# EAGLE board comcon_version_av_antigua (EAGLE 6.5.0)
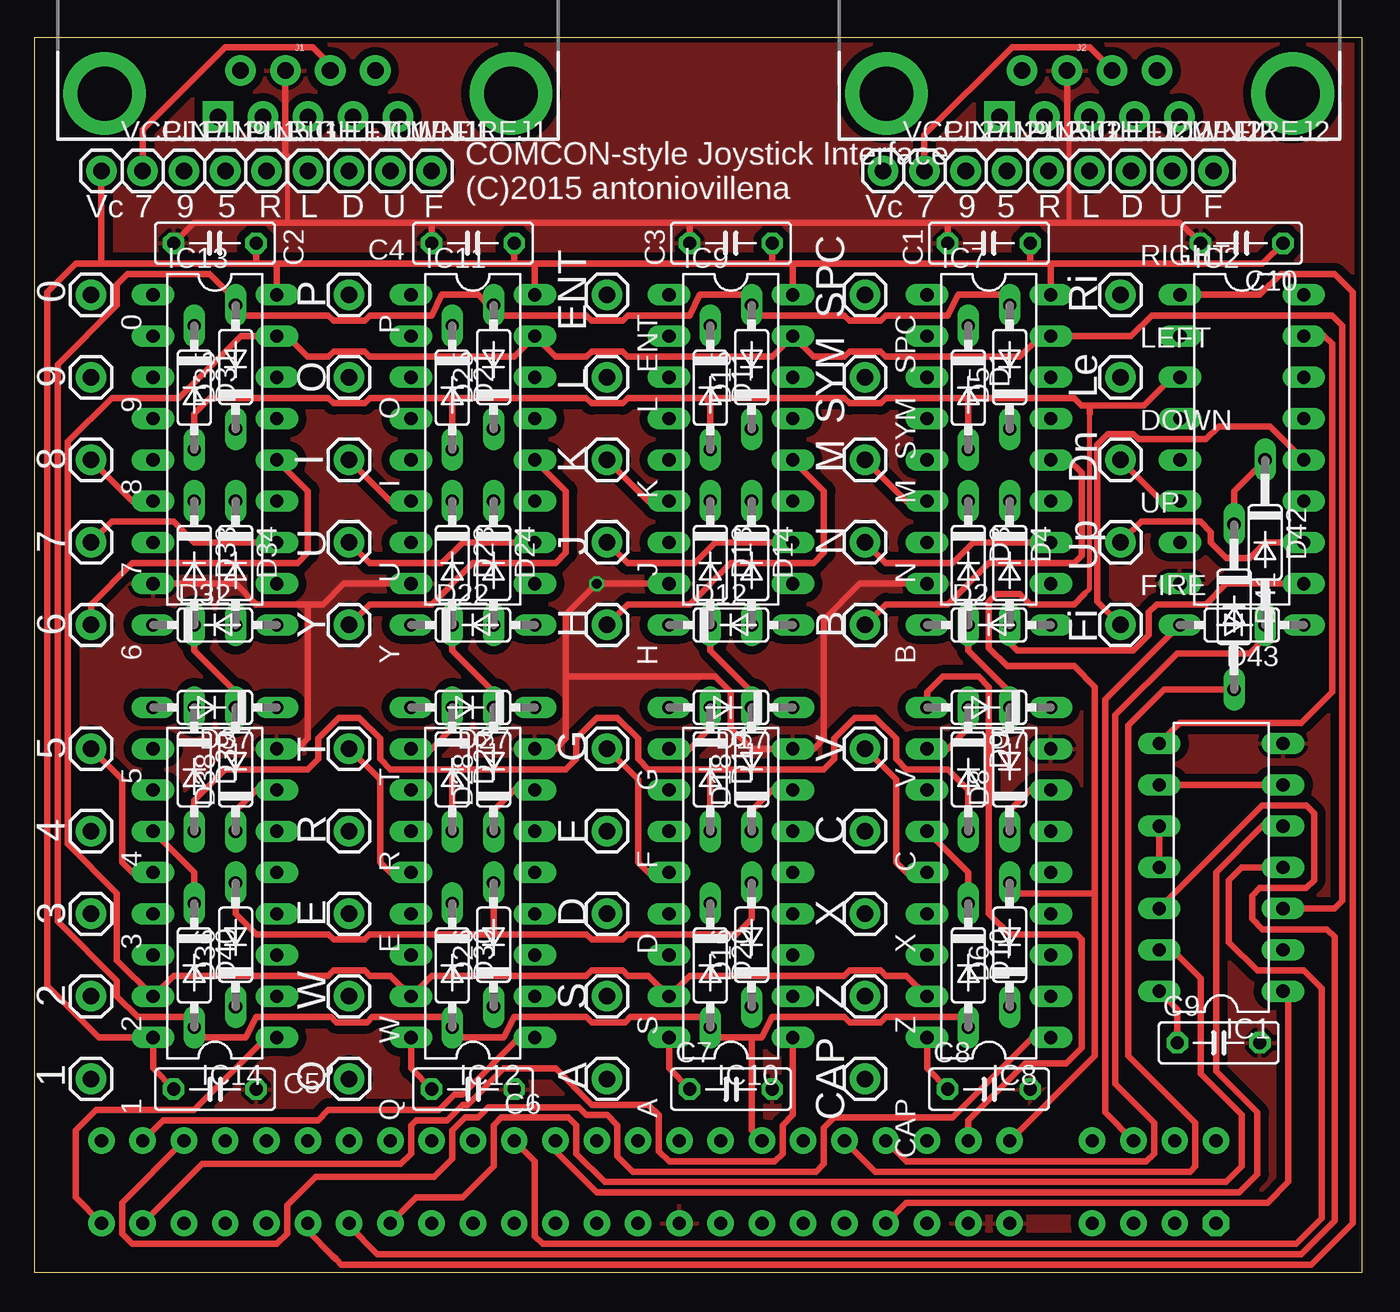
[diagram p0: board, top side]
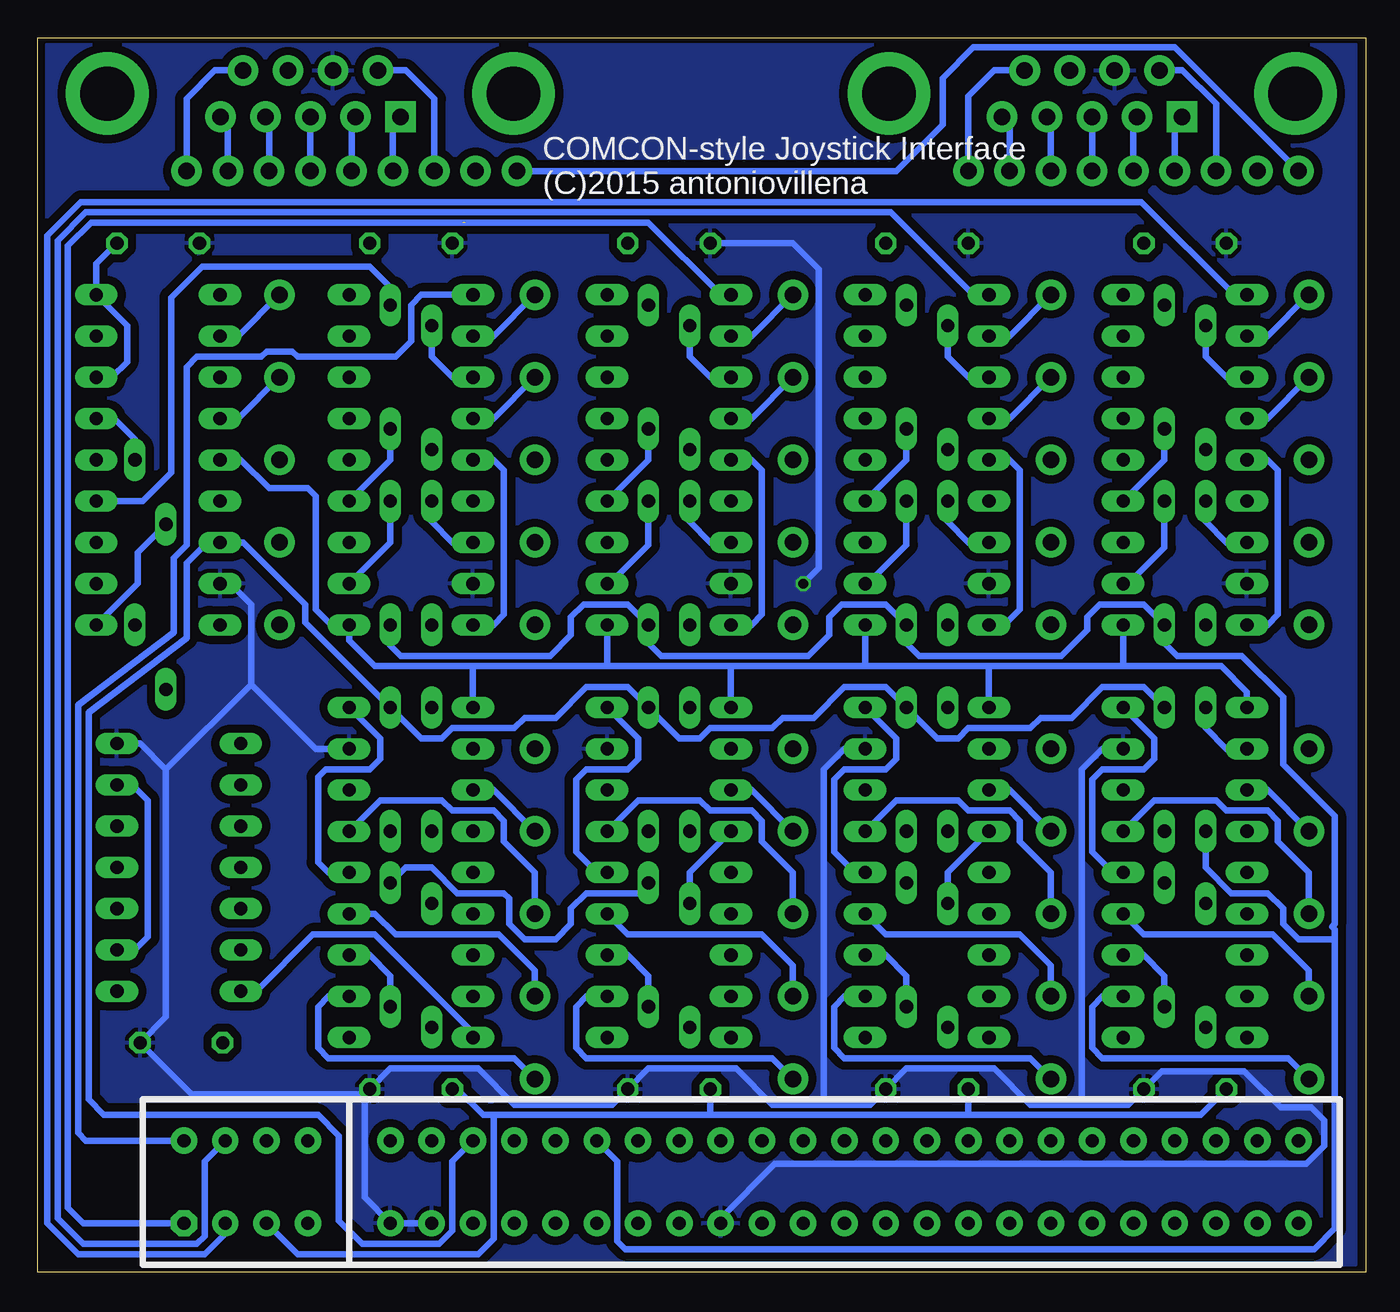
[diagram p1: board, bottom side, seen from below]

No outline drawn. Coordinates in mm, seen from the top.
Copper layers (1*16): Top 0.035mm / dielectric 1.5mm / Bottom 0.035mm
Design rules "seedstudio_Fusion_eagle_rule_v1.1 *": minimum track width 7mil, minimum drill 12mil, track to track 8mil, track to pad 10mil, pad to pad 6mil, via to via 10mil, smd to smd 0mil, copper to edge 10mil, drill to drill 10mil, minimum pad ring 10mil, minimum via ring 6mil, stop-mask expansion 2mil, vias tented up to drill 100mil, thermal gap 10mil
Net classes: 1 power: width 0.508 mm, clearance 0.254 mm to class 0, clearance 0.254 mm
Milling: 4 lines

## Footprints (pad centres in the part's own frame; a part is rotated, then mirrored left to right if it is on the bottom)
1X01 = drill 1.016 pad 1.88: 1 0,0
C050-025X075 = drill 0.813 octagon: 1 -2.54,0; 2 2.54,0
DO35-7 = drill 0.813 long: A 3.81,0; C -3.81,0
DO35-10 = drill 0.813 long: A 5.08,0; C -5.08,0
DIL14 = drill 0.813 long: 1 -7.62,-3.81; 2 -5.08,-3.81; 3 -2.54,-3.81; 4 0,-3.81; 5 2.54,-3.81; 6 5.08,-3.81; 7 7.62,-3.81; 8 7.62,3.81; 9 5.08,3.81; 10 2.54,3.81; 11 0,3.81; 12 -2.54,3.81; 13 -5.08,3.81; 14 -7.62,3.81
DIL16 = drill 0.813 long: 1 -8.89,-3.81; 2 -6.35,-3.81; 3 -3.81,-3.81; 4 -1.27,-3.81; 5 1.27,-3.81; 6 3.81,-3.81; 7 6.35,-3.81; 8 8.89,-3.81; 9 8.89,3.81; 10 6.35,3.81; 11 3.81,3.81; 12 1.27,3.81; 13 -1.27,3.81; 14 -3.81,3.81; 15 -6.35,3.81; 16 -8.89,3.81
DB9_MALE = drill 1.016 pad 1.88: 1 5.54,-1.42; 2 2.77,-1.42; 3 0,-1.42; 4 -2.77,-1.42; 6 4.15,1.42; 7 1.38,1.42; 8 -1.38,1.42; 9 -4.15,1.42 | drill 1.016 pad 1.88 square: 5 -5.54,-1.42 | drill 3.302 pad 5.08: G1 -12.5,0; G2 12.5,0
2X28_SPE = drill 0.813 pad 1.626 octagon: A1 0,-5.08 | drill 0.813 pad 1.626: A2 2.54,-5.08; A3 5.08,-5.08; A4 7.62,-5.08; A6 12.7,-5.08; A7 15.24,-5.08; A8 17.78,-5.08; A9 20.32,-5.08; A10 22.86,-5.08; A11 25.4,-5.08; A12 27.94,-5.08; A13 30.48,-5.08; A14 33.02,-5.08; A15 35.56,-5.08; A16 38.1,-5.08; A17 40.64,-5.08; A18 43.18,-5.08; A19 45.72,-5.08; A20 48.26,-5.08; A21 50.8,-5.08; A22 53.34,-5.08; A23 55.88,-5.08; A24 58.42,-5.08; A25 60.96,-5.08; A26 63.5,-5.08; A27 66.04,-5.08; A28 68.58,-5.08; B1 0,0; B2 2.54,0; B3 5.08,0; B4 7.62,0; B6 12.7,0; B7 15.24,0; B8 17.78,0; B9 20.32,0; B10 22.86,0; B11 25.4,0; B12 27.94,0; B13 30.48,0; B14 33.02,0; B15 35.56,0; B16 38.1,0; B17 40.64,0; B18 43.18,0; B19 45.72,0; B20 48.26,0; B21 50.8,0; B22 53.34,0; B23 55.88,0; B24 58.42,0; B25 60.96,0; B26 63.5,0; B27 66.04,0; B28 68.58,0

## Placement (x,y rotation side)
0  [1X01]  3.49,60.17 270 top
1  [1X01]  3.49,11.91 270 top
2  [1X01]  3.49,16.99 270 top
3  [1X01]  3.49,22.07 270 top
4  [1X01]  3.49,27.15 270 top
5  [1X01]  3.49,32.23 270 top
6  [1X01]  3.49,39.85 270 top
7  [1X01]  3.49,44.93 270 top
8  [1X01]  3.49,50.01 270 top
9  [1X01]  3.49,55.09 270 top
A  [1X01]  35.24,11.91 270 top
B  [1X01]  51.12,39.85 270 top
C  [1X01]  51.12,27.15 270 top
C1  100nF  [C050-025X075]  58.74,63.34 180 top
C2  100nF  [C050-025X075]  11.11,63.34 180 top
C3  100nF  [C050-025X075]  42.86,63.34 180 top
C4  100nF  [C050-025X075]  26.99,63.34 180 top
C5  100nF  [C050-025X075]  11.11,11.27 0 top
C6  100nF  [C050-025X075]  26.99,11.27 0 top
C7  100nF  [C050-025X075]  42.86,11.27 0 top
C8  100nF  [C050-025X075]  58.74,11.27 0 top
C9  100nF  [C050-025X075]  72.87,14.13 0 top
C10  100nF  [C050-025X075]  74.3,63.34 180 top
CAP  [1X01]  51.12,11.91 270 top
D  [1X01]  35.24,22.07 270 top
D1  [DO35-7]  57.47,54.45 270 top
D2  [DO35-7]  58.74,39.85 0 top
D3  [DO35-7]  57.47,43.66 270 top
D4  [DO35-7]  60.01,43.66 270 top
D5  [DO35-7]  60.01,55.72 90 top
D6  [DO35-7]  60.01,20.16 90 top
D7  [DO35-7]  58.74,34.77 180 top
D8  [DO35-7]  60.01,30.96 90 top
D9  [DO35-7]  57.47,30.96 270 top
D10  [DO35-7]  57.47,18.89 270 top
D11  [DO35-7]  41.59,54.45 270 top
D12  [DO35-7]  42.86,39.85 0 top
D13  [DO35-7]  41.59,43.66 270 top
D14  [DO35-7]  44.13,43.66 270 top
D15  [DO35-7]  44.13,55.72 90 top
D16  [DO35-7]  44.13,20.16 90 top
D17  [DO35-7]  42.86,34.77 180 top
D18  [DO35-7]  44.13,30.96 90 top
D19  [DO35-7]  41.59,30.96 270 top
D20  [DO35-7]  41.59,18.89 270 top
D21  [DO35-7]  25.72,54.45 270 top
D22  [DO35-7]  26.99,39.85 0 top
D23  [DO35-7]  25.72,43.66 270 top
D24  [DO35-7]  28.26,43.66 270 top
D25  [DO35-7]  28.26,55.72 90 top
D26  [DO35-7]  28.26,20.16 90 top
D27  [DO35-7]  26.99,34.77 180 top
D28  [DO35-7]  28.26,30.96 90 top
D29  [DO35-7]  25.72,30.96 270 top
D30  [DO35-7]  25.72,18.89 270 top
D31  [DO35-7]  9.84,54.45 270 top
D32  [DO35-7]  11.11,39.85 0 top
D33  [DO35-7]  9.84,43.66 270 top
D34  [DO35-7]  12.38,43.66 270 top
D35  [DO35-7]  12.38,55.72 90 top
D36  [DO35-7]  12.38,20.16 90 top
D37  [DO35-7]  11.11,34.77 180 top
D38  [DO35-7]  12.38,30.96 90 top
D39  [DO35-7]  9.84,30.96 270 top
D40  [DO35-7]  9.84,18.89 270 top
D41  [DO35-10]  73.82,40.96 270 top
D42  [DO35-10]  75.72,44.93 270 top
D43  [DO35-7]  74.3,39.85 180 top
DOWN  [1X01]  66.83,50.01 0 top
DOWNJ1  [1X01]  19.37,67.79 0 top
DOWNJ2  [1X01]  67.47,67.79 0 top
E  [1X01]  19.37,22.07 270 top
ENT  [1X01]  35.24,60.17 270 top
F  [1X01]  35.24,27.15 270 top
FIRE  [1X01]  66.83,39.85 0 top
FIREJ1  [1X01]  24.45,67.79 0 top
FIREJ2  [1X01]  72.55,67.79 0 top
G  [1X01]  35.24,32.23 270 top
H  [1X01]  35.24,39.85 270 top
I  [1X01]  19.37,50.01 270 top
IC1  74LS32N  [DIL14]  73.03,24.92 90 top
IC2  74LS366N  [DIL16]  74.3,51.28 270 top
IC7  74LS365N  [DIL16]  58.74,51.28 270 top
IC8  74LS365N  [DIL16]  58.74,23.34 90 top
IC9  74LS365N  [DIL16]  42.86,51.28 270 top
IC10  74LS365N  [DIL16]  42.86,23.34 90 top
IC11  74LS365N  [DIL16]  26.99,51.28 270 top
IC12  74LS365N  [DIL16]  26.99,23.34 90 top
IC13  74LS365N  [DIL16]  11.11,51.28 270 top
IC14  74LS365N  [DIL16]  11.11,23.34 90 top
J  [1X01]  35.24,44.93 270 top
J1  [DB9_MALE]  16.83,72.55 0 top
J2  [DB9_MALE]  64.93,72.55 0 top
K  [1X01]  35.24,50.01 270 top
L  [1X01]  35.24,55.09 270 top
LEFT  [1X01]  66.83,55.09 0 top
LEFTJ1  [1X01]  16.83,67.79 0 top
LEFTJ2  [1X01]  64.93,67.79 0 top
M  [1X01]  51.12,50.01 270 top
N  [1X01]  51.12,44.93 270 top
O  [1X01]  19.37,55.09 270 top
P  [1X01]  19.37,60.17 270 top
PIN5J1  [1X01]  11.75,67.79 0 top
PIN5J2  [1X01]  59.85,67.79 0 top
PIN7J1  [1X01]  6.67,67.79 0 top
PIN7J2  [1X01]  54.77,67.79 0 top
PIN9J1  [1X01]  9.21,67.79 0 top
PIN9J2  [1X01]  57.31,67.79 0 top
Q  [1X01]  19.37,11.91 270 top
R  [1X01]  19.37,27.15 270 top
RIGHT  [1X01]  66.83,60.17 0 top
RIGHTJ1  [1X01]  14.29,67.79 0 top
RIGHTJ2  [1X01]  62.39,67.79 0 top
S  [1X01]  35.24,16.99 270 top
SPC  [1X01]  51.12,60.17 270 top
SYM  [1X01]  51.12,55.09 270 top
T  [1X01]  19.37,32.23 270 top
U  [1X01]  19.37,44.93 270 top
U$3  [2X28_SPE]  72.71,8.1 0 bottom
UP  [1X01]  66.83,44.93 0 top
UPJ1  [1X01]  21.91,67.79 0 top
UPJ2  [1X01]  70.01,67.79 0 top
V  [1X01]  51.12,32.23 270 top
VCCJ1  [1X01]  4.13,67.79 0 top
VCCJ2  [1X01]  52.23,67.79 0 top
W  [1X01]  19.37,16.99 270 top
X  [1X01]  51.12,22.07 270 top
Y  [1X01]  19.37,39.85 270 top
Z  [1X01]  51.12,16.99 270 top

## Library data of the parts
0 1-9 A B C CAP D DOWN DOWNJ1 DOWNJ2 E ENT F FIRE FIREJ1 FIREJ2 G H I J J1 J2 K L LEFT LEFTJ1 LEFTJ2 M N O P PIN5J1 PIN5J2 PIN7J1 PIN7J2 PIN9J1 PIN9J2 Q R RIGHT RIGHTJ1 RIGHTJ2 S SPC SYM T U UP UPJ1 UPJ2 V VCCJ1 VCCJ2 W X Y Z = SparkFun-Connectors
C1-C10 = rcl
D1-D43 = diode
IC1 IC2 IC7-IC14 = 74xx-eu
U$3 = zx_edge

## Nets
9V: U$3.A4
+12V: U$3.B22
-5V: U$3.B20
-12V: U$3.B23
/IORQ: IC1.5 U$3.B17
/RD: IC1.4 U$3.B18
/RDIO: IC1.2 IC1.6 IC1.9
A0: IC1.1 U$3.A9
A5: IC2.1 U$3.A23
A6: IC1.12 U$3.A22
A7: IC1.13 U$3.A21
A8: IC8.1 U$3.B26
A9: IC10.1 U$3.A27
A10: IC12.1 U$3.B27
A11: IC14.1 U$3.A28
A12: IC13.1 U$3.A2
A13: IC11.1 U$3.B2
A14: IC9.1 U$3.A1
A15: IC7.1 U$3.B1
D0: D1.A D6.A D11.A D16.A D21.A D26.A D31.A D36.A IC2.3 U$3.B6
D1: D2.A D7.A D12.A D17.A D22.A D27.A D32.A D37.A IC2.5 U$3.B7
D2: D3.A D8.A D13.A D18.A D23.A D28.A D33.A D38.A IC2.7 U$3.B8
D3: D4.A D9.A D14.A D19.A D24.A D29.A D34.A D39.A IC2.9 U$3.B11
D4: D5.A D10.A D15.A D20.A D25.A D30.A D35.A D40.A IC2.11 U$3.B12
D5: D41.A U$3.B10
D6: D42.A U$3.B9
D7: D43.A U$3.B3
GND [power]: C1.2 C2.2 C3.2 C4.2 C5.2 C6.2 C7.2 C8.2 C9.2 C10.2 IC1.7 IC2.8 IC7.8 IC8.8 IC9.8 IC10.8 IC11.8 IC12.8 IC13.8 IC14.8 J1.8 J2.8 U$3.A6 U$3.A7 U$3.A14
IORQULA: IC1.3 IC7.15 IC8.15 IC9.15 IC10.15 IC11.15 IC12.15 IC13.15 IC14.15
KEMPSTON: IC1.8 IC2.15
N$1: D41.C D42.C D43.C IC2.13
N$2: IC7.2 SPC.1
N$3: D1.C IC7.3
N$4: IC1.10 IC1.11
N$5: J1.1 UPJ1.1
N$6: DOWNJ1.1 J1.2
N$7: J1.3 LEFTJ1.1
N$8: J1.4 RIGHTJ1.1
N$9: J1.5 PIN5J1.1
N$10: FIREJ1.1 J1.6
N$11: J1.9 PIN9J1.1
N$12: IC7.4 SYM.1
N$13: J2.1 UPJ2.1
N$14: DOWNJ2.1 J2.2
N$15: J2.3 LEFTJ2.1
N$16: J2.4 RIGHTJ2.1
N$17: J2.5 PIN5J2.1
N$18: IC7.6 M.1
N$19: D2.C IC7.5
N$20: IC7.10 N.1
N$21: D3.C IC7.7
N$22: B.1 IC7.12
N$23: D4.C IC7.9
N$24: D5.C IC7.11
N$25: CAP.1 IC8.2
N$26: IC8.4 Z.1
N$27: IC8.6 X.1
N$28: C.1 IC8.10
N$29: FIREJ2.1 J2.6
N$30: J2.9 PIN9J2.1
N$31: J1.7 PIN7J1.1
N$32: J2.7 PIN7J2.1
N$36: IC2.2 RIGHT.1
N$37: IC2.4 LEFT.1
N$38: DOWN.1 IC2.6
N$39: IC2.10 UP.1
N$40: FIRE.1 IC2.12
N$47: IC8.12 V.1
N$48: D6.C IC8.3
N$49: D7.C IC8.5
N$50: D8.C IC8.7
N$51: D9.C IC8.9
N$52: D10.C IC8.11
N$53: ENT.1 IC9.2
N$54: IC9.4 L.1
N$55: IC9.6 K.1
N$56: IC9.10 J.1
N$57: H.1 IC9.12
N$58: D11.C IC9.3
N$59: D12.C IC9.5
N$60: D13.C IC9.7
N$61: D14.C IC9.9
N$62: D15.C IC9.11
N$63: A.1 IC10.2
N$64: IC10.4 S.1
N$65: D.1 IC10.6
N$66: F.1 IC10.10
N$67: G.1 IC10.12
N$68: D16.C IC10.3
N$69: D17.C IC10.5
N$70: D18.C IC10.7
N$71: D19.C IC10.9
N$72: D20.C IC10.11
N$74: IC11.2 P.1
N$75: IC11.4 O.1
N$76: I.1 IC11.6
N$77: IC11.10 U.1
N$78: IC11.12 Y.1
N$79: D21.C IC11.3
N$80: D22.C IC11.5
N$81: D23.C IC11.7
N$82: D24.C IC11.9
N$83: D25.C IC11.11
N$84: IC12.2 Q.1
N$85: IC12.4 W.1
N$86: E.1 IC12.6
N$87: IC12.10 R.1
N$88: IC12.12 T.1
N$89: D26.C IC12.3
N$90: D27.C IC12.5
N$91: D28.C IC12.7
N$92: D29.C IC12.9
N$93: D30.C IC12.11
N$94: 0.1 IC13.2
N$95: 9.1 IC13.4
N$96: 8.1 IC13.6
N$97: 7.1 IC13.10
N$98: 6.1 IC13.12
N$99: D31.C IC13.3
N$100: D32.C IC13.5
N$101: D33.C IC13.7
N$102: D34.C IC13.9
N$103: D35.C IC13.11
N$104: 1.1 IC14.2
N$105: 2.1 IC14.4
N$106: 3.1 IC14.6
N$107: 4.1 IC14.10
N$108: 5.1 IC14.12
N$109: D36.C IC14.3
N$110: D37.C IC14.5
N$111: D38.C IC14.7
N$112: D39.C IC14.9
N$113: D40.C IC14.11
VCC [power]: C1.1 C2.1 C3.1 C4.1 C5.1 C6.1 C7.1 C8.1 C9.1 C10.1 IC1.14 IC2.14 IC2.16 IC7.16 IC8.16 IC9.16 IC10.16 IC11.16 IC12.16 IC13.16 IC14.16 U$3.A3 VCCJ1.1 VCCJ2.1

## Tracks (layer width: path | path; a pad name or v marks a point on that pad's centre or on a via)
/IORQ
  Top 0.406: U$3.B17 32.07,7.46 34.61,4.92 74.14,4.92 75.25,6.03 75.25,9.84 72.71,12.38 72.71,24.61 75.56,27.46 IC1.5
/RD
  Top 0.406: U$3.B18 30.8,6.83 30.8,2.22 31.27,1.75 77.63,1.75 79.22,3.33 79.22,17.46 78.11,18.57 75.25,18.57 73.5,20.32 73.5,24.13 74.3,24.92 IC1.4
/RDIO
  Top 0.406: IC1.9 IC1.6
  Bottom 0.406: IC1.6 75.88,30 74.93,29.05 74.93,20.64 75.72,19.84 IC1.2
A0
  Top 0.406: U$3.A9 53.66,4.29 75.88,4.29 77.15,5.56 77.15,16.99 IC1.1
A5
  Top 0.406: IC2.1 75.41,60.17 76.68,61.44 80.01,61.44 81.12,60.33 81.12,3.02 78.58,0.48 18.89,0.48 18.57,0.79 18.34,1.03 16.83,2.54 U$3.A23
A6
  Top 0.406: U$3.A22 19.37,2.86 21.11,1.11 77.95,1.11 80.01,3.17 80.01,20.64 79.53,21.11 75.56,21.11 74.93,21.75 74.93,23.18 75.41,23.65 78.26,23.65 78.74,24.13 78.74,28.26 78.26,28.73 75.56,28.73 IC1.12
A7
  Top 0.406: IC1.13 70.01,19.84 71.75,18.1 71.75,12.22 74.3,9.68 74.3,6.51 73.34,5.56 35.08,5.56 33.34,7.3 33.34,9.05 32.86,9.53 28.73,9.53 28.26,9.05 28.26,6.51 26.35,4.6 23.5,4.6 U$3.A21
A8
  Top 0.406: U$3.B26 5.4,4.29 5.4,2.38 6.03,1.75 14.92,1.75 15.56,2.38 15.56,4.13 17.3,5.87 24.61,5.87 25.72,6.99 25.72,8.73 26.51,9.53 27.3,9.53 27.94,10.16 33.5,10.16 33.97,9.68 35.24,9.68 35.88,9.05 35.88,7.14 36.83,6.19 48.1,6.19 48.58,6.67 48.58,8.89 49.21,9.53 56.52,9.53 61.44,14.45 IC8.1
A9
  Top 0.406: IC10.1 46.67,9.68 46.04,9.05 46.04,7.3 45.56,6.83 39.05,6.83 38.42,7.46 38.42,9.68 37.78,10.32 34.29,10.32 32.07,12.54 28.89,12.54 26.67,10.32 26.35,10.32 25.4,9.37 23.5,9.37 23.18,9.05 23.18,7.3 22.54,6.67 10.32,6.67 U$3.A27
A10
  Top 0.406: IC12.1 29.84,14.45 26.35,10.95 25.88,10.95 24.92,10 18.1,10 17.46,9.37 7.94,9.37 U$3.B27
A11
  Top 0.406: IC14.1 14.29,14.45 9.84,10 3.81,10 2.54,8.73 2.54,4.6 U$3.A28
A12
  Bottom 0.406: IC13.1 8.1,60.17 13.81,65.88 79.06,65.88 81.12,63.82 81.12,3.02 79.22,1.11 71.44,1.11 70.17,2.38 U$3.A2
A13
  Bottom 0.406: IC11.1 24.13,60.17 29.21,65.25 78.74,65.25 80.49,63.5 80.49,3.33 78.9,1.75 71.91,1.75 71.44,2.22 71.44,6.83 U$3.B2
A14
  Bottom 0.406: IC9.1 39.69,60.17 44.13,64.61 78.42,64.61 79.85,63.18 79.85,3.97 78.9,3.02 U$3.A1
A15
  Bottom 0.406: IC7.1 58.1,60.17 58.74,59.53 58.74,57.31 59.69,56.36 65.72,56.36 66.04,56.67 67.63,56.67 67.94,56.36 71.91,56.36 72.55,55.72 72.55,44.77 73.34,43.97 73.34,39.37 79.22,34.92 79.22,8.57 78.74,8.1 U$3.B1
D0
  Top 0.305: 64.93,52.86 64.93,42.07 64.61,41.75
  Top 0.406: D26.A 28.26,20.8 | 28.26,20.8 33.97,20.8 34.29,20.48 36.2,20.48 36.51,20.8 43.18,20.8 44.13,21.75 D16.A | 28.26,20.8 20.64,20.8 20.32,20.48 18.41,20.48 18.1,20.8 13.65,20.8 12.38,22.07 D36.A | D1.A 57.47,53.82 | 41.27,53.82 49.85,53.82 50.16,53.5 52.07,53.5 52.39,53.82 57.47,53.82 | 41.27,53.82 36.51,53.82 36.2,53.5 34.29,53.5 33.97,53.82 25.72,53.82 | 25.72,53.82 20.64,53.82 20.32,53.5 18.41,53.5 18.1,53.82 10.79,53.82 9.84,52.86 D31.A | D21.A 25.72,53.82 | D11.A 41.59,53.5 41.27,53.82 | D6.A 60.64,23.34 65.09,23.34 65.25,23.18 | 57.47,53.82 63.98,53.82 64.45,53.34 64.93,53.34 | IC2.3 70.01,55.09 68.26,53.34 64.93,53.34 | U$3.B6 65.25,13.34 65.25,23.18 | 65.25,23.18 65.25,36.04 63.98,37.31 59.85,37.31 58.74,38.42 58.74,41.27 59.21,41.75 60.64,41.75 61.28,41.12 63.98,41.12 64.61,41.75 | 64.93,52.86 64.93,53.34
  Bottom 0.406: D6.A 59.05,24.92 57.47,24.92 55.88,23.34 53.02,23.34 52.7,23.02 52.7,21.43 51.75,20.48 49.85,20.48 48.9,21.43 48.9,22.38 47.94,23.34 44.77,23.34 D16.A
D1
  Top 0.406: D7.A 54.93,35.72 55.88,36.67 58.1,36.67 58.74,36.04 58.74,22.07 60.01,20.8 64.14,20.8 64.45,20.48 64.45,13.81 63.5,12.86 60.96,12.86 57.47,9.37 U$3.B7
  Bottom 0.406: 23.18,37.31 D27.A | 39.05,37.31 D17.A | 54.93,37.31 60.96,37.31 62.55,38.89 D2.A 63.66,39.85 64.61,40.8 64.61,47.78 65.09,48.26 67.47,48.26 69.22,50.01 IC2.5 | D7.A 54.93,37.31 | 23.18,37.31 14.92,37.31 | 14.92,37.31 8.89,37.31 7.3,35.72 D37.A | 23.18,37.31 30.8,37.31 | 30.8,37.31 39.05,37.31 | 39.05,37.31 46.67,37.31 | 46.67,37.31 54.93,37.31 | D12.A 46.67,37.31 | D22.A 30.8,37.31 | D32.A 14.92,37.31
D2
  Top 0.406: D23.A 25.72,38.26 28.26,35.72 D28.A | D33.A 9.84,38.26 12.38,35.72 D38.A | D13.A 41.59,38.26 44.13,35.72 D18.A | D3.A 57.47,38.26 60.01,35.72 D8.A
  Bottom 0.406: D38.A 13.65,36.04 16.19,36.04 18.1,34.13 20,34.13 20.64,33.5 24.45,33.5 25.08,32.86 26.35,32.86 D28.A 29.53,36.04 32.07,36.04 33.97,34.13 35.88,34.13 36.51,33.5 40.32,33.5 40.96,32.86 42.23,32.86 D18.A 45.4,36.04 47.94,36.04 49.85,34.13 51.75,34.13 52.39,33.5 56.2,33.5 56.83,32.86 58.1,32.86 D8.A 65.25,40.01 65.25,41.12 69.06,44.93 IC2.7 71.28,44.93 72.55,43.66 72.55,39.05 78.58,34.45 78.58,10.64 77.63,9.68 64.45,9.68 63.18,8.41 63.18,3.17 61.75,1.75 56.99,1.75 56.2,2.54 56.2,6.83 U$3.B8
D3
  Top 0.406: D19.A 41.59,30.96 | 25.72,30.96 D29.A | 25.72,30.96 32.7,30.96 33.34,31.59 33.34,32.86 34.61,34.13 35.88,34.13 37.15,32.86 37.15,31.59 37.78,30.96 41.59,30.96 | 25.72,30.96 21.91,30.96 21.27,31.59 21.27,32.86 20,34.13 18.73,34.13 17.46,32.86 17.46,31.59 16.83,30.96 11.75,30.96 9.84,29.05 D39.A | D9.A 57.47,29.69 56.2,30.96 53.66,30.96 53.02,31.59 53.02,32.86 51.75,34.13 50.48,34.13 49.21,32.86 49.21,31.59 48.58,30.96 41.59,30.96 | IC2.9 73.34,42.39 72.07,41.12 69.06,41.12 68.58,40.64 68.58,39.21 67.63,38.26 60.48,38.26 60.01,38.73 D4.A
  Bottom 0.406: 1.91,20.48 4.13,20.48 5.08,21.43 5.08,22.38 6.03,23.34 8.26,23.34 9.84,24.92 D39.A | 1.91,20.48 1.91,2.7 3.17,1.43 45.56,1.43 46.04,1.91 46.04,6.83 U$3.B11 | 1.91,20.48 1.91,21.11 2.06,21.27 1.91,21.43 1.91,28.1 5.08,31.27 5.08,35.4 7.62,37.94 11.59,37.94 12.38,38.73 D34.A 13.65,41.12 16.35,41.12 17.14,40.32 17.14,39.53 18.73,37.94 27.46,37.94 28.26,38.73 D24.A 29.53,41.12 32.23,41.12 33.02,40.32 33.02,39.21 34.29,37.94 43.34,37.94 44.13,38.73 D14.A 45.4,41.12 48.1,41.12 48.9,40.32 48.9,39.21 50.16,37.94 59.37,37.94 60.01,38.58 D4.A
D4
  Top 0.406: 44.13,14.45 44.77,14.45 45.4,15.72 49.85,15.72 50.16,15.4 52.07,15.4 52.39,15.72 56.83,15.72 D10.A | 44.13,14.45 42.23,14.45 D20.A 40.96,15.72 36.67,15.72 36.35,15.4 34.29,15.4 33.97,15.72 29.53,15.72 28.89,14.45 26.35,14.45 D30.A 25.08,15.72 20.8,15.72 20.48,15.4 18.57,15.4 18.26,15.72 13.65,15.72 13.02,14.45 10.48,14.45 D40.A 9.21,15.72 6.35,15.72 5.08,16.99 5.08,17.94 1.43,21.59 1.43,55.88 5.08,59.53 5.08,60.8 5.71,61.44 10.79,61.44 12.38,59.85 D35.A 13.02,58.9 18.1,58.9 18.41,58.58 20.32,58.58 20.64,58.9 24.45,58.9 25.08,60.17 27.3,60.17 27.94,59.53 D25.A 28.89,58.9 33.97,58.9 34.29,58.58 36.2,58.58 36.51,58.9 40.32,58.9 40.96,60.17 43.5,60.17 D15.A 44.77,58.9 49.85,58.9 50.16,58.58 52.07,58.58 52.39,58.9 56.2,58.9 56.83,60.17 59.37,60.17 D5.A | U$3.B12 44.13,8.73 44.13,14.45
  Bottom 0.406: 77.95,47.47 IC2.11 75.25,47.47 73.5,49.21 73.5,60.01 71.6,61.91 61.28,61.91 60.01,60.64 D5.A
D5
  Top 0.406: D41.A 69.53,35.88 67.31,33.66 67.31,13.34 71.44,9.21 71.44,6.51 71.12,6.19 51.75,6.19 U$3.B10
D6
  Top 0.406: D42.A 75.56,38.89 74.77,38.1 70.33,38.1 66.52,34.29 66.52,11.59 68.9,9.21 68.9,7.3 68.42,6.83 53.66,6.83 U$3.B9
D7
  Top 0.406: 67.31,8.41 U$3.B3 65.88,9.84 65.88,35.24 D43.A
GND  (via drill 0.6)  (1 unrouted)
  Top 0.305: 15.56,68.74 15.56,64.61 | 63.55,69.9 63.61,69.9 63.66,69.85 63.66,64.77 63.82,64.61
  Top 0.406: 55.4,64.61 40.32,64.61 | 40.32,64.61 24.45,64.61 | 24.45,64.61 15.56,64.61 9.84,64.61 C2.2 | IC9.8 v34.61,42.39 32.7,40.48 32.7,36.67 | 32.7,36.67 32.7,32.86 32.07,32.23 IC12.8 | IC11.8 19.05,42.39 17.78,41.12 16.83,41.12 | 16.83,41.12 16.83,32.86 16.19,32.23 IC14.8 | IC7.8 50.8,42.39 48.58,40.16 48.58,32.86 47.94,32.23 IC10.8 44.13,32.23 42.86,33.5 42.86,35.72 41.91,36.67 32.7,36.67 | IC13.8 12.38,42.39 13.65,41.12 16.83,41.12 | J2.8 63.55,69.9 | 55.56,64.61 56.36,64.61 | 56.36,64.61 63.82,64.61 70.48,64.61 C10.2 | C1.2 56.2,64.45 56.36,64.61 | C3.2 40.32,64.61 | C4.2 24.45,64.61 | J1.8 15.45,68.85 15.56,68.74
  Bottom 0.406: 33.34,10.32 33.34,30.96 32.07,32.23 IC12.8 | 17.46,10.32 17.46,30.96 16.19,32.23 IC14.8 | U$3.A7 U$3.A6 61.59,4.6 61.59,10.95 | 61.59,10.95 C8.2 60.01,12.54 54.61,12.54 52.39,10.32 46.35,10.32 C7.2 44.13,12.54 38.73,12.54 36.51,10.32 33.34,10.32 | 33.34,10.32 30.48,10.32 C6.2 28.26,12.54 22.86,12.54 20.64,10.32 17.46,10.32 | 17.46,10.32 14.61,10.32 C5.2 12.54,12.38 7.46,12.38 5.24,10.16 3.33,10.16 2.54,9.37 2.54,7.78 3.65,6.67 36.35,6.67 39.69,3.33 U$3.A14 | C3.2 35.24,63.34 33.66,61.75 33.66,43.34 v34.61,42.39 | 61.59,10.95 72.23,10.95 C9.2 73.82,15.72 73.82,30.96 | IC1.7 75.41,32.54 73.82,30.96 | IC2.8 69.85,42.39 68.58,41.12 68.58,36.2 | 68.58,36.2 73.82,30.96 | IC8.8 64.61,32.23 68.58,36.2
  pour Top (isolate 0.508): 0.64,0.48 81.12,0.48 81.12,75.56 0.64,75.56
  pour Bottom (isolate 0.508): 0.64,0.48 81.12,0.48 81.12,75.56 0.64,75.56
IORQULA
  Top 0.406: IC8.15 53.66,18.26 52.39,18.26 52.07,18.57 50.16,18.57 49.85,18.26 40.32,18.26 IC10.15 37.78,18.26 36.51,18.26 36.2,18.57 34.29,18.57 33.97,18.26 24.45,18.26 IC12.15 21.91,18.26 20.64,18.26 20.32,18.57 18.41,18.57 18.1,18.26 8.57,18.26 IC14.15 5.08,19.21 5.08,23.34 2.06,26.35 2.06,51.12 4.76,53.82 8.89,53.82 12.7,57.63 IC13.15 15.56,57.63 16.83,56.36 18.1,56.36 18.41,56.67 20.32,56.67 20.64,56.36 29.53,56.36 IC11.15 32.07,56.36 33.97,56.36 34.29,56.67 36.2,56.67 36.51,56.36 45.4,56.36 IC9.15 47.94,56.36 49.85,56.36 50.16,56.67 52.07,56.67 52.39,56.36 60.64,56.36 61.91,57.63 IC7.15 67.47,57.63 68.74,58.9 79.85,58.9 80.49,58.26 80.49,22.86 80.01,22.38 IC1.3
KEMPSTON
  Top 0.406: IC2.15 79.38,57.63 79.85,57.15 79.85,35.72 77.95,33.81 70.48,33.81 IC1.8
N$1
  Top 0.406: D41.C 73.82,48.1 D42.C
  Bottom 0.406: D43.C 75.56,42.39 75.56,44.29 D41.C | IC2.13 76.99,52.55 75.72,51.28 D42.C
N$2
  Bottom 0.406: IC7.2 53.66,57.63 SPC.1
N$3
  Bottom 0.406: IC7.3 56.2,55.09 57.47,56.36 D1.C
N$4
  Top 0.406: IC1.10 IC1.11
N$5
  Bottom 0.406: UPJ1.1 21.91,70.67 J1.1
N$6
  Bottom 0.406: DOWNJ1.1 19.37,70.9 J1.2
N$7
  Bottom 0.406: LEFTJ1.1 J1.3
N$8
  Bottom 0.406: RIGHTJ1.1 14.29,70.9 J1.4
N$9
  Bottom 0.406: PIN5J1.1 11.75,70.67 J1.5
N$10
  Bottom 0.406: FIREJ1.1 24.45,72.39 22.86,73.98 J1.6
N$11
  Bottom 0.406: PIN9J1.1 9.21,71.91 11.27,73.98 J1.9
N$12
  Bottom 0.406: IC7.4 53.66,52.55 SYM.1
N$13
  Bottom 0.406: UPJ2.1 70.01,70.67 J2.1
N$14
  Bottom 0.406: DOWNJ2.1 67.47,70.9 J2.2
N$15
  Bottom 0.406: LEFTJ2.1 J2.3
N$16
  Bottom 0.406: RIGHTJ2.1 62.39,70.9 J2.4
N$17
  Bottom 0.406: PIN5J2.1 59.85,70.67 J2.5
N$18
  Top 0.406: IC7.6 53.66,47.47 M.1
N$19
  Bottom 0.406: IC7.5 53.66,50.01 53.02,49.37 53.02,40.48 53.66,39.85 D2.C
N$20
  Top 0.406: N.1 52.39,43.66 56.52,43.66 57.78,44.93 IC7.10
N$21
  Bottom 0.406: D3.C 57.47,46.2 56.2,44.93 IC7.7
N$22
  Top 0.406: B.1 52.39,41.12 56.2,41.12 58.74,43.66 63.98,43.66 64.45,44.13 64.45,49.21 63.66,50.01 IC7.12
N$23
  Bottom 0.406: D4.C 60.01,44.93 IC7.9
N$24
  Bottom 0.406: D5.C 60.01,50.01 IC7.11
N$25
  Bottom 0.406: CAP.1 52.39,13.18 63.82,13.18 64.45,13.81 64.45,16.35 63.82,16.99 IC8.2
N$26
  Bottom 0.406: Z.1 51.12,18.57 53.34,20.8 59.69,20.8 60.96,22.07 IC8.4
N$27
  Bottom 0.406: X.1 51.12,24.61 53.02,26.51 53.02,27.78 53.66,28.42 56.2,28.42 56.83,29.05 60.64,29.05 IC8.6
N$28
  Bottom 0.406: IC8.10 53.66,29.69 C.1
N$29
  Bottom 0.406: FIREJ2.1 72.55,72.23 70.8,73.98 J2.6
N$30
  Bottom 0.406: PIN9J2.1 57.31,72.23 59.05,73.98 J2.9
N$31
  Top 0.406: J1.7 18.21,74.34 17.14,75.41 11.75,75.41 6.67,70.33 PIN7J1.1
N$32
  Top 0.406: J2.7 66.31,74.03 64.93,75.41 60.17,75.41 54.77,70.01 PIN7J2.1
N$36
  Bottom 0.406: IC2.2 69.37,57.63 RIGHT.1
N$37
  Bottom 0.406: IC2.4 69.37,52.55 LEFT.1
N$38
  Top 0.406: IC2.6 69.37,47.47 DOWN.1
N$39
  Top 0.406: IC2.10 75.72,44.93 74.77,43.97 73.34,43.97 72.39,44.93 72.39,45.56 71.75,46.2 68.1,46.2 UP.1
N$40
  Top 0.406: IC2.12 76.04,52.07 72.87,52.07 72.07,51.28 67.94,51.28 67.63,51.59 66.04,51.59 65.41,50.96 65.41,41.27 FIRE.1
N$47
  Top 0.406: V.1 53.02,30.32 53.02,25.24 53.66,24.61 IC8.12
N$48
  Bottom 0.406: D6.C 60.01,18.26 61.28,19.53 IC8.3
N$49
  Bottom 0.406: D7.C 60.64,32.86 60.64,31.59 61.28,30.96 63.98,30.96 64.45,30.48 64.45,25.24 63.82,24.61 IC8.5
N$50
  Top 0.406: IC8.7 61.28,29.69 60.01,28.42 D8.C
N$51
  Top 0.406: D9.C 57.47,33.5 56.2,32.23 IC8.9
N$52
  Top 0.406: D10.C 57.47,24.61 IC8.11
N$53
  Bottom 0.406: IC9.2 37.78,57.63 ENT.1
N$54
  Bottom 0.406: IC9.4 37.78,52.55 L.1
N$55
  Top 0.406: IC9.6 37.78,47.47 K.1
N$56
  Top 0.406: J.1 36.51,43.66 40.64,43.66 41.91,44.93 IC9.10
N$57
  Top 0.406: H.1 36.51,41.12 40.32,41.12 42.86,43.66 47.94,43.66 48.58,44.29 48.58,48.1 IC9.12
N$58
  Bottom 0.406: D11.C 41.59,56.36 40.32,55.09 IC9.3
N$59
  Bottom 0.406: IC9.5 37.78,50.01 37.15,49.37 37.15,40.48 37.78,39.85 D12.C
N$60
  Bottom 0.406: IC9.7 40.32,44.93 41.59,46.2 D13.C
N$61
  Bottom 0.406: IC9.9 46.51,42.39 44.13,44.77 D14.C
N$62
  Bottom 0.406: D15.C 44.13,50.01 IC9.11
N$63
  Bottom 0.406: A.1 36.51,13.18 47.94,13.18 48.58,13.81 48.58,16.35 47.94,16.99 IC10.2
N$64
  Bottom 0.406: S.1 35.24,18.89 37.15,20.8 45.4,20.8 IC10.4
N$65
  Bottom 0.406: D.1 35.24,24.61 37.15,26.51 37.15,27.78 37.78,28.42 40.32,28.42 40.96,29.05 44.77,29.05 IC10.6
N$66
  Bottom 0.406: F.1 37.78,29.69 IC10.10
N$67
  Top 0.406: G.1 37.15,30.32 37.15,25.24 37.78,24.61 IC10.12
N$68
  Bottom 0.406: D16.C 44.13,18.26 45.4,19.53 IC10.3
N$69
  Bottom 0.406: IC10.5 47.31,24.61 48.58,25.88 48.58,30.32 47.94,30.96 45.4,30.96 44.77,31.59 44.77,32.86 D17.C
N$70
  Top 0.406: IC10.7 45.4,29.69 44.13,28.42 D18.C
N$71
  Top 0.406: D19.C 41.59,33.5 40.32,32.23 IC10.9
N$72
  Bottom 0.406: D20.C 41.59,24.61 IC10.11
N$74
  Bottom 0.406: IC11.2 21.91,57.63 P.1
N$75
  Bottom 0.406: IC11.4 21.91,52.55 O.1
N$76
  Top 0.406: IC11.6 21.91,47.47 I.1
N$77
  Top 0.406: U.1 20.64,43.66 25.08,43.66 26.35,44.93 IC11.10
N$78
  Top 0.406: Y.1 20.64,41.12 24.45,41.12 26.99,43.66 32.07,43.66 32.7,44.29 32.7,48.1 IC11.12
N$79
  Bottom 0.406: D21.C 25.72,56.36 24.45,55.09 IC11.3
N$80
  Bottom 0.406: D22.C 22.23,39.85 21.27,40.8 21.27,49.37 22.23,50.32 22.86,50.32 IC11.5
N$81
  Bottom 0.406: D23.C 25.72,46.2 24.45,44.93 IC11.7
N$82
  Bottom 0.406: IC11.9 30.64,42.39 28.26,44.77 D24.C
N$83
  Bottom 0.406: D25.C 28.26,50.01 IC11.11
N$84
  Bottom 0.406: Q.1 20.64,13.18 32.07,13.18 32.7,13.81 32.7,16.35 32.07,16.99 IC12.2
N$85
  Bottom 0.406: W.1 19.37,18.89 21.27,20.8 29.53,20.8 IC12.4
N$86
  Bottom 0.406: E.1 19.37,24.61 21.27,26.51 21.27,27.78 21.91,28.42 24.45,28.42 25.08,29.05 28.89,29.05 IC12.6
N$87
  Bottom 0.406: R.1 21.91,29.69 IC12.10
N$88
  Top 0.406: T.1 21.27,30.32 21.27,25.24 21.91,24.61 IC12.12
N$89
  Bottom 0.406: IC12.3 29.53,19.53 28.26,18.26 D26.C
N$90
  Bottom 0.406: IC12.5 31.43,24.61 32.7,25.88 32.7,30.32 32.07,30.96 29.53,30.96 28.89,31.59 28.89,32.86 D27.C
N$91
  Top 0.406: D28.C 28.26,28.42 29.53,29.69 IC12.7
N$92
  Top 0.406: D29.C 25.72,33.5 24.45,32.23 IC12.9
N$93
  Bottom 0.406: D30.C 25.72,24.61 IC12.11
N$94
  Bottom 0.406: IC13.2 6.03,57.63 0.1
N$95
  Bottom 0.406: IC13.4 6.03,52.55 9.1
N$96
  Top 0.406: IC13.6 6.03,47.47 8.1
N$97
  Top 0.406: IC13.10 9.84,44.93 8.57,46.2 4.76,46.2 7.1
N$98
  Top 0.406: IC13.12 16.83,48.1 16.83,44.29 16.19,43.66 6.03,43.66 3.49,41.12 6.1
N$99
  Bottom 0.406: D31.C 9.84,56.36 8.57,55.09 IC13.3
N$100
  Bottom 0.406: D32.C 6.03,39.85 5.4,40.48 5.4,49.37 6.03,50.01 IC13.5
N$101
  Bottom 0.406: D33.C 9.84,46.2 8.57,44.93 IC13.7
N$102
  Bottom 0.406: IC13.9 14.61,42.39 12.38,44.61 D34.C
N$103
  Bottom 0.406: D35.C 12.38,50.01 IC13.11
N$104
  Bottom 0.406: 1.1 4.76,13.18 16.19,13.18 16.83,13.81 16.83,16.35 16.19,16.99 IC14.2
N$105
  Bottom 0.406: 2.1 3.49,18.57 5.71,20.8 13.65,20.8 IC14.4
N$106
  Bottom 0.406: 3.1 3.49,24.61 5.4,26.51 5.4,27.78 6.03,28.42 8.57,28.42 9.21,29.05 13.02,29.05 IC14.6
N$107
  Bottom 0.406: 4.1 6.03,29.69 IC14.10
N$108
  Top 0.406: 5.1 5.4,30.32 5.4,25.24 6.03,24.61 IC14.12
N$109
  Bottom 0.406: D36.C 12.38,18.26 13.65,19.53 IC14.3
N$110
  Bottom 0.406: D37.C 13.02,32.86 13.02,31.59 13.65,30.96 16.19,30.96 16.83,30.32 16.83,25.88 15.56,24.61 IC14.5
N$111
  Top 0.406: D38.C 12.38,28.42 13.65,29.69 IC14.7
N$112
  Bottom 0.406: D39.C 9.84,33.5 8.57,32.23 IC14.9
N$113
  Top 0.406: D40.C 9.84,24.61 IC14.11
VCC
  Top 0.406: C7.1 39.05,12.54 IC10.16 | C6.1 23.18,12.54 IC12.16 | IC8.16 54.93,12.54 C8.1 | 14.92,62.07 29.53,62.07 | 29.53,62.07 30.8,62.07 | 30.8,62.07 45.4,62.07 | 45.4,62.07 46.67,62.07 | IC9.16 46.67,62.07 | C3.1 45.4,62.07 | IC11.16 30.8,62.07 | C4.1 29.53,62.07 | IC13.16 14.92,62.07 | 4.13,62.07 2.54,62.07 0.79,60.33 0.79,17.62 3.97,14.45 IC14.16 7.3,12.54 C5.1 | 4.13,62.07 13.65,62.07 | 13.65,62.07 14.92,62.07 | C2.1 13.65,62.07 | C9.1 70.33,16.19 IC1.14 | 46.67,62.07 61.44,62.07 | 61.44,62.07 62.55,62.07 | 62.55,62.07 75.56,62.07 C10.1 | IC7.16 62.55,62.07 | C1.1 61.28,62.23 61.44,62.07 | VCCJ1.1 4.13,62.07
  Bottom 0.406: U$3.A3 65.72,1.11 54.61,1.11 53.66,2.06 53.66,9.68 | C8.1 55.88,11.27 54.29,9.68 53.66,9.68 | 40.32,9.68 C7.1 | 24.45,9.68 10.16,9.68 C5.1 | 24.45,9.68 40.32,9.68 | 40.32,9.68 53.66,9.68 | C6.1 24.45,9.68 | IC8.16 54.93,14.76 60.96,20.8 64.77,20.8 68.26,17.3 IC1.14 | IC2.14 77.15,55.09 76.2,56.04 76.2,58.26 IC2.16 78.11,62.07 C10.1 | VCCJ2.1 28.89,67.79 26.04,70.64 26.04,73.5 24.13,75.41 11.75,75.41 VCCJ1.1

## Text on the board
tPlace: Vc | 7 | 9 | 5 | R | L | D | U | F | Vc | 7 | 9 | 5 | R | L | D | U | F | 0 | P | SPC | Ri | ENT | 9 | O | L | Le | SYM | I | 8 | K | M | Dn | 7 | U | J | N | Up | 6 | Y | H | B | Fi | 5 | T | G | V | 4 | R | F | C | 3 | E | D | X | 2 | W | S | Z | 1 | Q | A | CAP
tNames: COMCON-style Joystick Interface / (C)2015 antoniovillena
bNames: COMCON-style Joystick Interface / (C)2015 antoniovillena